# Altium PCB ROW.PcbDoc (part 2 of 3)
Units mm, origin at the board's own origin, x right, y up, seen from the top; angles counter-clockwise.
Board outline 176.65 x 110.9 mm, 2 copper layers (Top Layer, Bottom Layer); 156 components, 298 nets, 1223 pads, 409 vias.
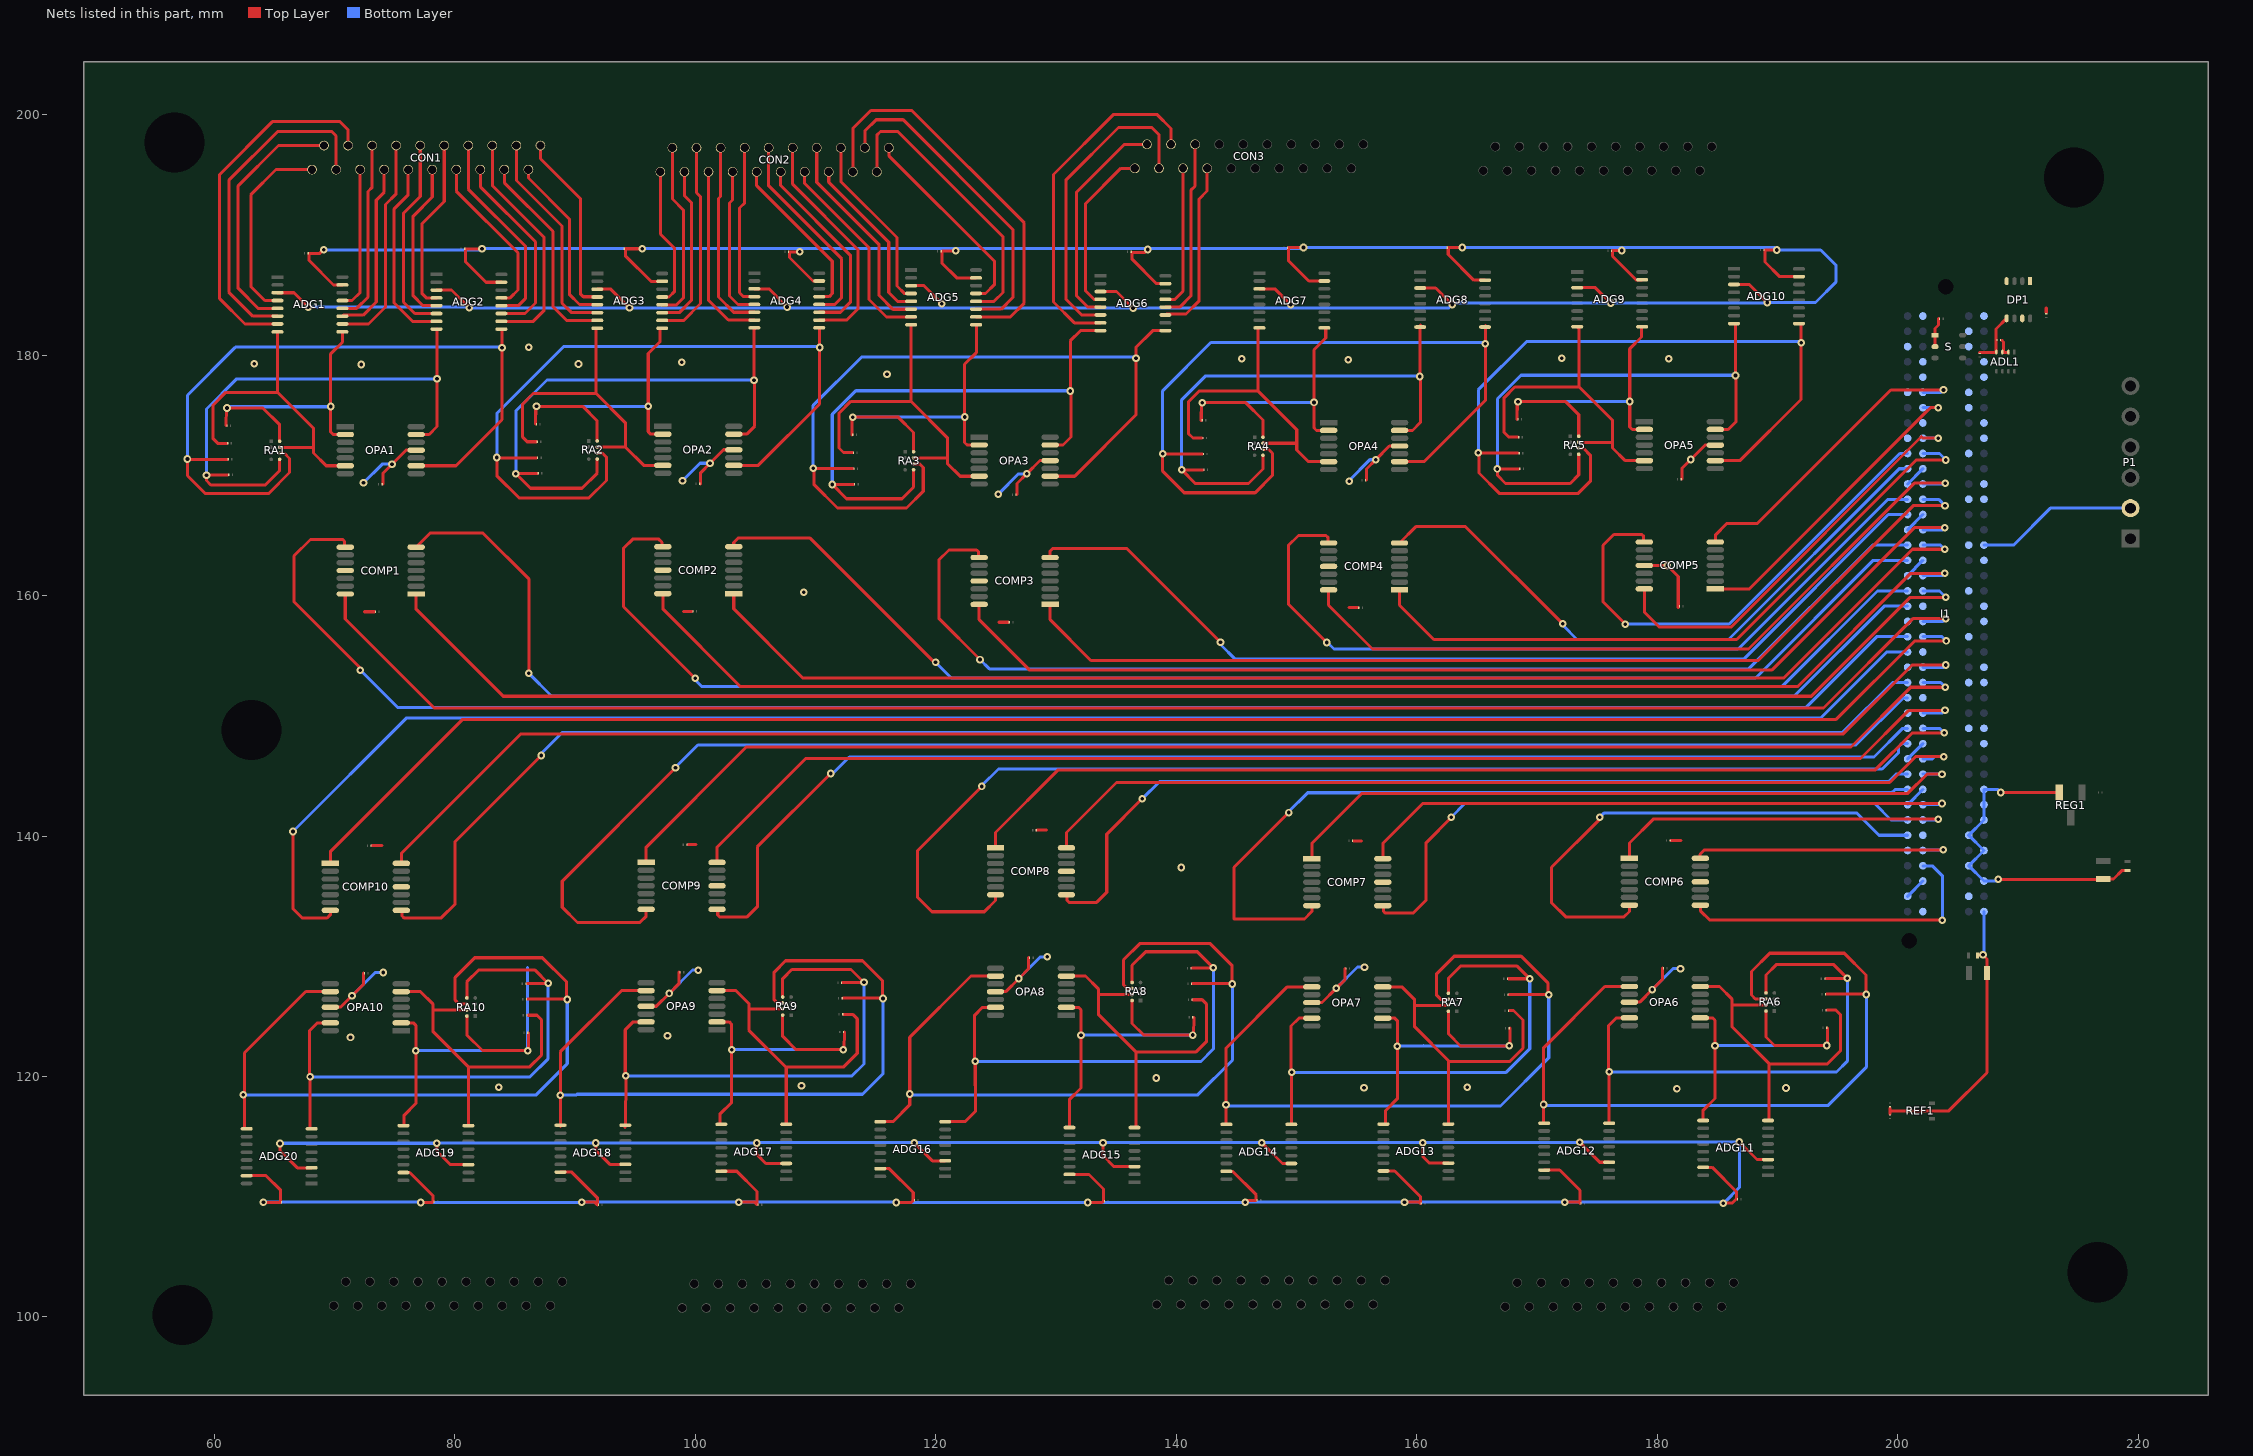
[diagram p2: the nets of this part, all layers, seen from the top]

## Via types
v1: diameter 0.635, hole 0.305, Top Layer to Bottom Layer, 409 vias

## Nets (pads, with @x,y where several pads share a name; then routed paths per layer and width w, separated by ;. In a path a pad name is that pad's centre, name@x,y a point inside that pad or via, vN(x,y) a via of type N, cw(c..) or ccw(c..) an arc to the next point about the centre after c; other vN are vias at no path point) (continued)
GND: ADG1.3 ADG1.15 ADG2.3 ADG2.15 ADG3.3 ADG3.15 ADG4.3 ADG4.15 ADG5.3 ADG5.15 ADG6.3 ADG6.15 ADG7.3 ADG7.15 ADG8.3 ADG8.15 ADG9.3 ADG9.15 ADG10.3 ADG10.15 ADG11.3 ADG11.15 ADG12.3 ADG12.15 ADG13.3 ADG13.15 ADG14.3 ADG14.15 ADG15.3 ADG15.15 ADG16.3 ADG16.15 ADG17.3 ADG17.15 ADG18.3 ADG18.15 ADG19.3 ADG19.15 ADG20.3 ADG20.15 ADL1.4 C1.2 C2.2 C3.2 C4.2 C5.2 C6.2 C7.2 C8.2 C9.2 C10.2 C31.1 C32.1 C33.1 C34.1 C35.1 C36.1 C37.1 C38.1 C39.1 C40.1 C41.1 C42.1 C43.1 C44.1 C45.1 C46.1 C47.1 C48.1 C49.1 C50.1 C51.2 C52.2 C53.2 C54.2 C55.2 C56.2 C57.2 C58.2 C59.2 C60.2 C81.1 C82.1 C83.1 C84.1 C85.1 C86.1 C87.1 C88.1 C89.1 C90.1 COMP1.11 COMP2.11 COMP3.11 COMP4.11 COMP5.11 COMP6.11 COMP7.11 COMP8.11 COMP9.11 COMP10.11 DP1.1 DP1.4 DP1.5 DP1.7 I1.1 I1.2 I1.c1 I1.c4 I1.c5 I1.c8 I1.c9 I1.c12 I1.c13 I1.c16 I1.c17 I1.c20 I1.c21 I1.c24 I1.c25 I1.c28 I1.c29 I1.c32 I1.c33 I1.c34 I1.c36 I1.c38 I1.c40 I1.d2 I1.d3 I1.d6 I1.d7 I1.d10 I1.d13 I1.d16 I1.d19 I1.d22 I1.d25 I1.d28 I1.d35 I1.d37 I1.d39 I1.g1 I1.g4 I1.g5 I1.g8 I1.g11 I1.g14 I1.g17 I1.g20 I1.g23 I1.g26 I1.g29 I1.g32 I1.g35 I1.g38 I1.g40 I1.h3 I1.h6 I1.h9 I1.h12 I1.h15 I1.h18 I1.h21 I1.h24 I1.h27 I1.h30 I1.h33 I1.h36 I1.h39 OPA1.11 OPA2.11 OPA3.11 OPA4.11 OPA5.11 OPA6.11 OPA7.11 OPA8.11 OPA9.11 OPA10.11 P1.2 REF1.3 REG1.2 S.1 S.2 | length 851.6
  Top Layer w0.254: ADG20.15@62.68,111.755 64.29,111.755 65.503,110.542 65.503,109.535 64.09,109.535 v1(64.075,109.55) ; ADG1.3@65.244,185.184 66.616,185.184 v1(67.8,184) ; v1(65.45,114.425) 65.45,113.85 66.895,112.405 ADG20.3@68.08,112.405 ; v1(69.1,188.75) 69.05,188.75 68.73,188.43 67.88,188.43 67.88,187.858 69.904,185.834 ADG1.15@70.644,185.834 ; OPA10.11@69.636,125.762 70.487,125.762 v1(71.439,126.714) 72.39,127.665 72.39,128.595 ; 72.49,158.65 73.305,158.65 ; 73.11,139.205 73.945,139.205 ; 74.03,169.26 74.03,170.19 v1(74.765,170.925) 75.933,172.093 OPA1.11@76.784,172.093 ; ADG19.15@75.72,112.015 76.233,112.015 78.193,110.055 78.193,109.595 ; v1(77.15,109.525) 78.123,109.525 ; ADG2.3@78.465,185.406 79.719,185.406 v1(81.2,183.925) ; v1(78.5,114.45) 78.5,113.8 79.635,112.665 ADG19.3@81.12,112.665 ; v1(82.25,188.85) 82.23,188.83 80.89,188.83 80.89,187.745 82.579,186.056 ADG2.15@83.865,186.056 ; ADG18.15@88.78,112.045 89.72,112.045 91.846,109.919 91.846,109.335 91.631,109.55 v1(90.55,109.55) ; v1(91.725,114.475) 91.725,113.85 92.88,112.695 ADG18.3@94.18,112.695 ; ADG3.3@91.84,185.48 92.97,185.48 v1(94.525,183.925) ; v1(95.575,188.85) 95.565,188.84 94.174,188.84 94.174,188.256 96.3,186.13 ADG3.15@97.24,186.13 ; OPA9.11@95.896,125.842 96.747,125.842 v1(97.815,126.91) 98.65,127.745 98.65,128.675 ; 99.01,158.68 99.72,158.68 ; 99.37,139.285 100.055,139.285 ; 100.44,169.29 100.44,170.22 v1(101.22,171) 102.343,172.123 OPA2.11@103.194,172.123 ; ADG17.15@102.155,112.119 103.441,112.119 105.13,110.43 105.13,109.345 104.925,109.55 v1(103.6,109.55) ; ADG4.3@104.9,185.51 106.115,185.51 v1(107.625,184) ; v1(105.1,114.475) 105.1,113.525 105.856,112.769 ADG17.3@107.555,112.769 ; v1(108.675,188.6) 108.655,188.58 107.827,188.58 107.827,188.12 109.787,186.16 ADG4.15@110.3,186.16 ; ADG16.15@115.376,112.341 116.134,112.341 118.12,110.355 118.12,109.695 117.95,109.525 v1(116.7,109.525) ; ADG5.3@117.94,185.77 119.005,185.77 v1(120.5,184.275) ; v1(118.2,114.5) 119.709,112.991 ADG16.3@120.776,112.991 ; v1(121.65,188.675) 121.615,188.64 120.517,188.64 120.517,187.633 121.73,186.42 ADG5.15@123.34,186.42 ; OPA8.11@124.956,127.052 125.807,127.052 v1(126.905,128.15) 127.71,128.955 127.71,129.885 ; 125.26,157.78 126.03,157.78 ; 126.75,168.39 126.75,169.32 v1(127.55,170.12) 128.653,171.223 OPA3.11@129.504,171.223 ; 128.43,140.495 129.215,140.495 ; ADG15.15@131.12,111.855 132.73,111.855 133.943,110.642 133.943,109.635 133.833,109.525 v1(132.625,109.525) ; ADG6.3@133.684,185.284 135.016,185.284 v1(136.4,183.9) ; v1(133.9,114.5) 133.9,113.425 134.82,112.505 ADG15.3@136.52,112.505 ; v1(137.625,188.775) 137.38,188.53 136.32,188.53 136.32,187.958 138.344,185.934 ADG6.15@139.084,185.934 ; ADG14.15@144.16,112.115 144.673,112.115 146.633,110.155 146.633,109.695 145.87,109.695 v1(145.725,109.55) ; ADG7.3@146.905,185.506 148.194,185.506 v1(149.525,184.175) ; v1(147.1,114.5) 148.835,112.765 ADG14.3@149.56,112.765 ; v1(150.575,188.95) 150.555,188.93 149.33,188.93 149.33,187.845 151.019,186.156 ADG7.15@152.305,186.156 ; OPA7.11@151.266,126.152 152.117,126.152 v1(153.3,127.335) 154.02,128.055 154.02,128.985 ; 154.34,158.99 155.09,158.99 ; 154.74,139.595 155.395,139.595 ; 155.81,169.6 155.81,170.53 v1(156.575,171.295) 157.713,172.433 OPA4.11@158.564,172.433 ; ADG13.15@157.22,112.145 158.16,112.145 160.286,110.019 160.286,109.435 160.171,109.55 v1(158.975,109.55) ; ADG8.3@160.28,185.58 161.57,185.58 v1(162.95,184.2) ; v1(160.5,114.5) 160.5,113.35 161.055,112.795 ADG13.3@162.62,112.795 ; v1(163.775,188.95) 163.765,188.94 162.614,188.94 162.614,188.356 164.74,186.23 ADG8.15@165.68,186.23 ; ADG12.15@170.595,112.219 171.881,112.219 173.57,110.53 173.57,109.445 173.465,109.55 v1(172.3,109.55) ; ADG9.3@173.34,185.61 174.84,185.61 v1(176.125,184.325) ; v1(173.55,114.525) 175.206,112.869 ADG12.3@175.995,112.869 ; v1(177.05,188.7) 177.03,188.68 176.267,188.68 176.267,188.22 178.227,186.26 ADG9.15@178.74,186.26 ; OPA6.11@177.676,126.182 178.527,126.182 v1(179.575,127.23) 180.43,128.085 180.43,129.015 ; COMP5.11@178.92,162.5 v1(180.825,162.5) 181.742,161.583 181.742,159.024 ; 181.15,139.625 181.985,139.625 ; 182.07,169.68 182.07,170.61 v1(182.775,171.315) 183.973,172.513 OPA5.11@184.824,172.513 ; ADG11.15@183.816,112.441 184.556,112.441 186.58,110.417 186.58,109.845 186.205,109.47 v1(185.48,109.47) ; ADG10.3@186.38,185.87 187.655,185.87 v1(189.15,184.375) ; v1(186.825,114.55) 188.284,113.091 ADG11.3@189.216,113.091 ; v1(189.94,188.74) 188.957,188.74 188.957,187.733 190.17,186.52 ADG10.15@191.78,186.52 ; 199.35,116.89 199.35,117.39 ; 199.35,117.14 REF1.3@200.925,117.14 204.24,117.14 207.42,120.32 C48.1@207.42,128.61 207.42,129.78 v1(207.08,130.12) 206.675,130.12 C47.1@206.635,130.08 ; S.2@203.095,180.705 S.1@203.095,181.655 203.095,182.215 203.385,182.505 ; 203.395,182.505 203.395,183.045 ; 206.81,180.22 208.17,180.22 208.173,180.223 208.173,182.173 DP1.5@209.05,183.05 ; v1(208.35,136.4) C50.1@216.775,136.4 ; v1(208.575,143.625) 208.58,143.62 REG1.2@213.43,143.62 ; 212.345,183.535 212.345,183.92 ; C50.1@217.07,136.42 217.94,136.42 218.665,137.145 C49.1@219.095,137.145
  Bottom Layer w0.254: v1(64.075,109.55) 77.125,109.55 v1(77.15,109.525) 90.525,109.525 v1(90.55,109.55) v1(103.6,109.55) 116.675,109.55 v1(116.7,109.525) v1(132.625,109.525) 145.7,109.525 v1(145.725,109.55) v1(158.975,109.55) v1(172.3,109.55) 185.61,109.55 186.825,110.765 v1(186.825,114.55) 173.575,114.55 v1(173.55,114.525) 160.525,114.525 v1(160.5,114.5) v1(147.1,114.5) v1(133.9,114.5) v1(118.2,114.5) 105.125,114.5 v1(105.1,114.475) v1(91.725,114.475) 78.525,114.475 v1(78.5,114.45) 65.475,114.45 v1(65.45,114.425) ; v1(67.8,184) 81.125,184 v1(81.2,183.925) v1(94.525,183.925) 162.675,183.925 v1(162.95,184.2) 163.075,184.325 v1(176.125,184.325) v1@189.1,184.325 ; v1(69.1,188.75) 82.15,188.75 v1(82.25,188.85) v1(95.575,188.85) 150.475,188.85 v1(150.575,188.95) v1(163.775,188.95) v1@189.73,188.95 ; v1(71.439,126.714) 73.375,128.65 v1(74.05,128.65) ; v1(72.4,169.375) 73.95,170.925 v1(74.765,170.925) ; v1(97.815,126.91) 99.755,128.85 v1(100.25,128.85) ; v1(98.925,169.55) 100.375,171 v1(101.22,171) ; v1@108.84,160.26 v1(109,160.26) ; v1(125.175,168.425) 126.87,170.12 v1(127.55,170.12) ; v1(126.905,128.15) 128.705,129.95 v1(129.275,129.95) ; v1(153.3,127.335) 155.065,129.1 v1(155.65,129.1) ; v1(154.375,169.5) 154.375,169.575 156.095,171.295 v1(156.575,171.295) ; v1(179.575,127.23) 181.32,128.975 v1(181.925,128.975) ; v1(189.15,184.375) 193.15,184.375 194.875,186.1 194.875,187.45 193.585,188.74 v1(189.94,188.74) ; I1.h39@200.815,134.985 I1.g38@202.085,136.255 ; I1.h33@200.815,142.605 I1.g32@202.085,143.875 ; I1.h30@200.815,146.415 I1.g29@202.085,147.685 ; I1.h18@200.815,161.655 I1.g17@202.085,162.925 ; I1.h15@200.815,165.465 I1.g14@202.085,166.735 ; I1.h12@200.815,169.275 I1.g11@202.085,170.545 ; v1(207.08,130.12) v1@207.09,130.13 ; v1@207.165,130.205 I1.c40@207.165,133.715 ; I1.c16@207.165,164.195 209.62,164.195 212.69,167.265 P1.2@219.35,167.265 ; v1(208.35,136.4) 208.205,136.255 I1.c38@207.165,136.255 I1.d37@205.895,137.525 I1.c36@207.165,138.795 I1.d35@205.895,140.065 I1.c34@207.165,141.335 I1.c33@207.165,142.605 I1.c32@207.165,143.875 208.325,143.875 v1(208.575,143.625)
  other v1: 181.63,118.98 155.61,119.06 190.7,119.04 83.65,119.1 164.18,119.12 108.825,119.225 138.34,119.88 71.32,123.25 97.68,123.38 140.42,137.38 115.94,178.39 72.22,179.22 90.28,179.26 63.3,179.27 98.86,179.4 154.3,179.62 145.45,179.69 180.94,179.7 172.04,179.73 86.15,180.64
GND0: 
M1: ADG1.9 C11.2 OPA1.2 RA1.8 | length 26.4
  Top Layer w0.254: 60.966,174.131 60.986,175.6 v1(61.045,175.6) 64.025,175.6 65.423,174.202 RA1.8@65.423,172.825 ; ADG1.9@70.644,181.934 70.644,181.074 69.668,180.098 v1(69.668,175.72) 69.668,173.602 69.877,173.393 OPA1.2@70.884,173.393
  Bottom Layer w0.254: v1@61.145,175.7 69.648,175.7 v1(69.668,175.72)
M2: ADG1.8 C12.2 OPA1.6 RA1.7 | length 32.1
  Top Layer w0.254: 61.028,172.662 60.273,172.662 59.895,173.04 59.895,175.845 60.95,176.9 65.244,176.9 ADG1.8@65.244,181.934 65.244,176.906 68.233,173.917 68.233,171.857 69.297,170.793 OPA1.6@70.884,170.793 ; RA1.7@65.423,172.325 68.208,172.325
M3: ADG2.9 C13.2 OPA1.9 RA1.6 | length 65.9
  Top Layer w0.254: 61.065,171.323 57.801,171.323 57.774,171.35 v1(57.754,171.35) 57.754,169.971 59.25,168.475 64.5,168.475 66.25,170.225 66.25,171.4 65.825,171.825 RA1.6@65.423,171.825 ; OPA1.9@76.784,170.793 80.083,170.793 83.915,174.625 ADG2.9@83.915,182.106
  Bottom Layer w0.254: v1(57.754,171.35) 57.754,176.654 61.7,180.6 ; 61.77,180.67 66.71,180.67 v1@83.85,180.67
  other v1: 83.92,180.6
M4: ADG2.8 C14.2 OPA1.13 RA1.5 | length 45.7
  Top Layer w0.254: v1(59.335,170.01) 59.335,169.565 59.7,169.2 64.225,169.2 65.423,170.398 RA1.5@65.423,171.325 ; v1@59.335,170.013 61.118,170.013 ; OPA1.13@76.784,173.393 77.856,173.393 78.515,174.052 ADG2.8@78.515,182.106
  Bottom Layer w0.254: v1(59.335,170.01) 59.335,175.51 61.85,178.025 v1(78.515,178.025)
M5: ADG3.9 C15.2 OPA2.2 RA2.8 | length 28.2
  Top Layer w0.254: 86.701,174.261 86.721,175.73 v1(86.78,175.73) 90.62,175.73 91.833,174.517 RA2.8@91.833,172.855 ; ADG3.9@97.054,182.21 97.054,181.104 96.078,180.128 v1(96.078,175.75) 96.078,173.632 96.287,173.423 OPA2.2@97.294,173.423
  Bottom Layer w0.254: v1@86.91,175.73 96.058,175.73 v1(96.078,175.75)
M6: ADG3.8 C16.2 OPA2.6 RA2.7 | length 27.4
  Top Layer w0.254: 86.763,172.792 86.008,172.792 85.63,173.17 85.63,175.93 86.5,176.8 91.75,176.8 ; ADG3.8@91.75,182.14 91.75,176.8 ; RA2.7@91.833,172.355 94.175,172.355 ; OPA2.6@97.294,170.823 95.707,170.823 94.175,172.355 ; 91.75,176.8 94.175,174.375 94.175,172.355
M7: ADG4.9 C17.2 OPA2.9 RA2.6 | length 66.3
  Top Layer w0.254: 86.8,171.453 83.536,171.453 83.509,171.48 v1(83.489,171.48) 83.489,169.961 85.325,168.125 91.15,168.125 92.6,169.575 92.6,171.5 92.245,171.855 RA2.6@91.833,171.855 ; OPA2.9@103.194,170.823 105.233,170.823 110.325,175.915 ADG4.9@110.325,182.136
  Bottom Layer w0.254: v1(83.489,171.48) 83.489,175.139 89.08,180.73 v1@110.23,180.73
  other v1: 110.33,180.63
M8: ADG4.8 C18.2 OPA2.13 RA2.5 | length 46.9
  Top Layer w0.254: 86.853,170.143 85.07,170.143 86.288,168.925 90.575,168.925 91.833,170.183 RA2.5@91.833,171.355 ; OPA2.13@103.194,173.423 104.266,173.423 104.925,174.082 v1@104.925,177.86 ; v1(104.875,177.91) ADG4.8@104.875,182.186
  Bottom Layer w0.254: v1(85.07,170.14) 85.07,175.345 87.655,177.93 v1@104.855,177.93
M9: ADG5.9 C19.2 OPA3.2 RA3.8 | length 29.4
  Top Layer w0.254: 113.011,173.361 113.031,174.83 v1(113.09,174.83) 116.87,174.83 118.143,173.557 RA3.8@118.143,171.955 ; ADG5.9@123.364,182.496 123.364,180.204 122.388,179.228 v1(122.388,174.85) 122.388,172.732 122.597,172.523 OPA3.2@123.604,172.523
  Bottom Layer w0.254: v1@113.22,174.83 122.368,174.83 v1(122.388,174.85)
M10: ADG5.8 C20.2 OPA3.6 RA3.7 | length 29.2
  Top Layer w0.254: 113.073,171.892 112.318,171.892 111.94,172.27 111.94,175.165 112.925,176.15 117.925,176.15 ; ADG5.8@117.925,182.505 117.925,176.15 ; RA3.7@118.143,171.455 120.948,171.455 ; OPA3.6@123.604,169.923 122.017,169.923 120.953,170.987 120.953,173.122 117.925,176.15
M11: ADG6.9 C21.2 OPA3.9 RA3.6 | length 69.5
  Top Layer w0.254: 113.11,170.553 109.846,170.553 109.846,169.254 111.825,167.275 117.55,167.275 118.95,168.675 118.95,170.65 118.645,170.955 RA3.6@118.143,170.955 ; OPA3.9@129.504,169.923 131.543,169.923 136.635,175.015 136.635,180.635 138.034,182.034 ADG6.9@139.084,182.034
  Bottom Layer w0.254: v1(109.799,170.58) 109.799,175.819 113.81,179.83 v1@136.54,179.83
  other v1: 136.64,179.73
M12: ADG6.8 C22.2 OPA3.13 RA3.5 | length 50.1
  Top Layer w0.254: 113.163,169.243 111.38,169.243 112.573,168.05 117.175,168.05 118.143,169.018 RA3.5@118.143,170.455 ; OPA3.13@129.504,172.523 130.576,172.523 131.235,173.182 v1@131.235,176.96 ; v1(131.185,177.01) 131.18,181.18 132.034,182.034 ADG6.8@133.684,182.034
  Bottom Layer w0.254: v1(111.38,169.24) 111.38,175.07 113.34,177.03 v1@131.165,177.03
M13: ADG7.9 C23.2 OPA4.2 RA4.8 | length 27.8
  Top Layer w0.254: 142.071,174.571 142.091,176.04 v1(142.15,176.04) 145.76,176.04 147.203,174.597 RA4.8@147.203,173.165 ; ADG7.9@152.424,182.274 152.424,181.414 151.448,180.438 v1(151.448,176.06) 151.448,173.942 151.657,173.733 OPA4.2@152.664,173.733
  Bottom Layer w0.254: v1@142.28,176.04 151.428,176.04 v1(151.448,176.06)
M14: ADG7.8 C24.2 OPA4.6 RA4.7 | length 27.5
  Top Layer w0.254: 142.133,173.102 141.378,173.102 141,173.48 141,176.1 141.925,177.025 146.775,177.025 ; ADG7.8@146.905,182.256 146.775,182.126 146.775,177.025 ; RA4.7@147.203,172.665 150.003,172.665 ; OPA4.6@152.664,171.133 150.992,171.133 150.013,172.112 150.013,173.787 146.775,177.025
M15: ADG8.9 C25.2 OPA4.9 RA4.6 | length 67.1
  Top Layer w0.254: 142.17,171.763 138.906,171.763 138.879,171.79 v1(138.859,171.79) 138.859,170.341 140.65,168.55 146.55,168.55 148,170 148,171.825 147.66,172.165 RA4.6@147.203,172.165 ; OPA4.9@158.564,171.133 160.603,171.133 165.695,176.225 ADG8.9@165.695,182.446
  Bottom Layer w0.254: v1(138.859,171.79) 138.859,177.029 142.87,181.04 v1@165.6,181.04
  other v1: 165.7,180.94
M16: ADG8.8 C26.2 OPA4.13 RA4.5 | length 47
  Top Layer w0.254: 142.223,170.453 140.44,170.453 141.568,169.325 146,169.325 147.203,170.528 RA4.5@147.203,171.665 ; OPA4.13@158.564,173.733 159.636,173.733 160.295,174.392 v1@160.295,178.17 ; v1(160.245,178.22) ADG8.8@160.28,182.33
  Bottom Layer w0.254: v1(140.44,170.45) 140.44,176.28 142.4,178.24 v1@160.225,178.24
M17: ADG9.9 C27.2 OPA5.2 RA5.8 | length 28
  Top Layer w0.254: 168.331,174.651 168.351,176.12 v1(168.41,176.12) 172.38,176.12 173.463,175.037 RA5.8@173.463,173.245 ; ADG9.9@178.684,182.354 178.684,181.494 177.708,180.518 v1(177.708,176.14) 177.708,174.022 177.917,173.813 OPA5.2@178.924,173.813
  Bottom Layer w0.254: v1@168.54,176.12 177.688,176.12 v1(177.708,176.14)
M18: ADG9.8 C28.2 OPA5.6 RA5.7 | length 28
  Top Layer w0.254: 168.393,173.182 167.638,173.182 167.26,173.56 167.26,176.46 168.15,177.35 173.5,177.35 ; ADG9.8@173.34,182.36 173.5,182.2 173.5,177.35 ; RA5.7@173.463,172.745 176.243,172.745 ; OPA5.6@178.924,171.213 177.337,171.213 176.273,172.277 176.273,174.577 173.5,177.35
M19: ADG10.9 C29.2 OPA5.9 RA5.6 | length 67.8
  Top Layer w0.254: 168.43,171.843 165.166,171.843 165.166,170.184 166.85,168.5 173.425,168.5 174.425,169.5 174.425,171.675 173.855,172.245 RA5.6@173.463,172.245 ; OPA5.9@184.824,171.213 186.863,171.213 191.955,176.305 ADG10.9@191.955,182.526
  Bottom Layer w0.254: v1(165.119,171.87) 165.119,177.109 169.13,181.12 v1@191.86,181.12
  other v1: 191.96,181.02
M20: ADG10.8 C30.2 OPA5.13 RA5.5 | length 47.8
  Top Layer w0.254: 168.483,170.533 166.7,170.533 v1(166.7,170.53) 166.7,170 167.375,169.325 172.75,169.325 173.463,170.038 RA5.5@173.463,171.745 ; OPA5.13@184.824,173.813 185.896,173.813 186.555,174.472 v1@186.555,178.25 ; v1(186.505,178.3) ADG10.8@186.505,182.576
  Bottom Layer w0.254: v1(166.7,170.53) 166.7,176.36 168.66,178.32 v1@186.485,178.32
M21: ADG11.9 C61.2 OPA6.2 RA6.8 | length 28.3
  Top Layer w0.254: OPA6.2@183.576,124.882 184.583,124.882 184.792,124.673 v1(184.792,122.555) 184.792,118.177 183.816,117.201 ADG11.9@183.816,116.341 ; RA6.8@189.037,125.45 189.037,123.288 189.75,122.575 v1(194.09,122.575) 194.149,122.575 194.169,124.044
  Bottom Layer w0.254: v1(184.792,122.555) 184.812,122.575 186.986,122.575 ; 186.968,122.593 186.986,122.575 ; v1@193.96,122.575 186.986,122.575
M22: ADG11.8 C62.2 OPA6.6 RA6.7 | length 27.8
  Top Layer w0.254: OPA6.6@183.576,127.482 185.163,127.482 186.227,126.418 186.227,124.123 189.3,121.05 ; 186.252,125.95 RA6.7@189.037,125.95 ; ADG11.8@189.3,116.425 189.3,121.05 ; 194.107,125.513 194.862,125.513 195.24,125.135 195.24,122.14 194.15,121.05 189.3,121.05
M23: ADG12.9 C63.2 OPA6.9 RA6.6 | length 68.7
  Top Layer w0.254: ADG12.9@170.545,116.169 170.545,122.39 175.637,127.482 OPA6.9@177.676,127.482 ; RA6.6@189.037,126.45 188.15,126.45 187.825,126.775 187.825,128.725 189.35,130.25 195.55,130.25 197.361,128.439 197.361,126.825 197.334,126.852 194.07,126.852
  Bottom Layer w0.254: v1@170.64,117.575 194.175,117.575 197.381,120.781 v1(197.381,126.825)
  other v1: 170.54,117.675
M24: ADG12.8 C64.2 OPA6.13 RA6.5 | length 48
  Top Layer w0.254: v1@175.945,120.445 175.945,124.223 176.604,124.882 OPA6.13@177.676,124.882 ; ADG12.8@175.995,116.119 v1(175.995,120.395) ; RA6.5@189.037,126.95 189.037,128.437 189.925,129.325 194.637,129.325 195.8,128.162 194.017,128.162
  Bottom Layer w0.254: v1@176.015,120.375 194.9,120.375 195.8,121.275 v1(195.8,128.165)
M25: ADG13.9 C65.2 OPA7.2 RA7.8 | length 28.4
  Top Layer w0.254: OPA7.2@157.166,124.852 158.173,124.852 158.382,124.643 v1(158.382,122.525) 158.382,118.147 157.406,117.171 ADG13.9@157.406,116.065 ; RA7.8@162.627,125.42 162.627,123.548 163.63,122.545 v1(167.68,122.545) 167.739,122.545 167.759,124.014
  Bottom Layer w0.254: v1(158.382,122.525) 158.402,122.545 160.576,122.545 ; 160.558,122.563 160.576,122.545 ; v1@167.55,122.545 160.576,122.545
M26: ADG13.8 C66.2 OPA7.6 RA7.7 | length 27.8
  Top Layer w0.254: OPA7.6@157.166,127.452 158.753,127.452 159.817,126.388 159.817,124.133 162.675,121.275 ; 159.847,125.92 RA7.7@162.627,125.92 ; ADG13.8@162.65,116.075 162.65,121.25 167.725,121.25 168.83,122.355 168.83,124.695 168.042,125.483 167.697,125.483
M27: ADG14.9 C67.2 OPA7.9 RA7.6 | length 67
  Top Layer w0.254: ADG14.9@144.135,116.139 144.135,122.36 149.227,127.452 OPA7.9@151.266,127.452 ; RA7.6@162.627,126.42 161.98,126.42 161.65,126.75 161.65,128.55 163.1,130 168.675,130 170.924,127.751 170.924,126.822 167.66,126.822
  Bottom Layer w0.254: v1@144.23,117.545 166.96,117.545 170.971,121.556 v1(170.971,126.795)
  other v1: 144.13,117.645
M28: ADG14.8 C68.2 OPA7.13 RA7.5 | length 47.1
  Top Layer w0.254: v1@149.535,120.415 149.535,124.193 150.194,124.852 OPA7.13@151.266,124.852 ; ADG14.8@149.585,116.089 v1(149.585,120.365) ; RA7.5@162.627,126.92 162.627,128.177 163.625,129.175 168.347,129.175 169.39,128.132 167.607,128.132
  Bottom Layer w0.254: v1@149.605,120.345 167.43,120.345 169.39,122.305 v1(169.39,128.135)
M29: ADG15.9 C69.2 OPA8.2 RA8.8 | length 29.6
  Top Layer w0.254: OPA8.2@130.856,125.752 131.863,125.752 132.072,125.543 v1(132.072,123.425) 132.072,119.047 131.096,118.071 ADG15.9@131.096,115.779 ; RA8.8@136.317,126.32 136.317,124.408 137.28,123.445 v1(141.37,123.445) 141.429,123.445 141.449,124.914
  Bottom Layer w0.254: v1(132.072,123.425) 132.092,123.445 134.266,123.445 ; 134.248,123.463 134.266,123.445 ; v1@141.24,123.445 134.266,123.445
M30: ADG15.8 C70.2 OPA8.6 RA8.7 | length 29.4
  Top Layer w0.254: OPA8.6@130.856,128.352 132.443,128.352 133.507,127.288 133.507,125.168 136.625,122.05 ; 133.527,126.82 RA8.7@136.317,126.82 ; ADG15.8@136.52,115.755 136.625,115.86 136.625,122.05 ; 141.387,126.383 142.142,126.383 142.52,126.005 142.52,122.92 141.65,122.05 136.625,122.05
M31: ADG16.9 C71.2 OPA8.9 RA8.6 | length 70.2
  Top Layer w0.254: ADG16.9@115.376,116.241 116.426,116.241 117.825,117.64 117.825,123.26 122.917,128.352 OPA8.9@124.956,128.352 ; RA8.6@136.317,127.32 135.905,127.32 135.6,127.625 135.6,129.7 136.95,131.05 142.825,131.05 144.614,129.261 144.614,127.722 141.35,127.722
  Bottom Layer w0.254: v1@117.92,118.445 141.745,118.445 144.661,121.361 v1(144.661,127.695)
  other v1: 117.82,118.545
M32: ADG16.8 C72.2 OPA8.13 RA8.5 | length 50.8
  Top Layer w0.254: ADG16.8@120.776,116.241 122.426,116.241 123.28,117.095 v1(123.275,121.265) ; v1@123.225,121.315 123.225,125.093 123.884,125.752 OPA8.13@124.956,125.752 ; RA8.5@136.317,127.82 136.317,129.242 137.45,130.375 141.737,130.375 143.08,129.032 141.297,129.032
  Bottom Layer w0.254: v1@123.295,121.245 142.045,121.245 143.08,122.28 v1(143.08,129.035)
M33: ADG17.9 C73.2 OPA9.2 RA9.8 | length 28
  Top Layer w0.254: OPA9.2@101.796,124.542 102.803,124.542 103.012,124.333 v1(103.012,122.215) 103.012,117.837 102.036,116.861 ADG17.9@102.036,116.001 ; RA9.8@107.257,125.11 107.257,123.343 108.365,122.235 v1(112.31,122.235) 112.369,122.235 112.389,123.704
  Bottom Layer w0.254: v1(103.012,122.215) 103.032,122.235 105.206,122.235 ; 105.188,122.253 105.206,122.235 ; v1@112.18,122.235 105.206,122.235
M34: ADG17.8 C74.2 OPA9.6 RA9.7 | length 27.7
  Top Layer w0.254: OPA9.6@101.796,127.142 103.383,127.142 104.447,126.078 104.447,123.853 107.555,120.745 ADG17.8@107.555,116.019 ; 104.487,125.61 RA9.7@107.257,125.61 ; 107.555,120.775 112.3,120.775 113.46,121.935 113.46,124.795 113.082,125.173 112.327,125.173
M35: ADG18.9 C75.2 OPA9.9 RA9.6 | length 67.2
  Top Layer w0.254: ADG18.9@88.765,115.829 88.765,122.05 93.857,127.142 OPA9.9@95.896,127.142 ; RA9.6@107.257,126.11 106.815,126.11 106.55,126.375 106.55,128.675 107.5,129.625 113.9,129.625 115.554,127.971 115.554,126.512 112.29,126.512
  Bottom Layer w0.254: v1(88.75,118.45) 90.075,118.45 90.15,118.525 113.9,118.525 115.601,120.226 v1(115.601,126.485)
M36: ADG18.8 C76.2 OPA9.13 RA9.5 | length 47.7
  Top Layer w0.254: v1@94.165,120.105 94.165,123.883 94.824,124.542 OPA9.13@95.896,124.542 ; ADG18.8@94.18,115.945 v1(94.215,120.055) ; RA9.5@107.257,126.61 107.257,128.132 108.025,128.9 112.942,128.9 114.02,127.822 112.237,127.822
  Bottom Layer w0.254: v1@94.235,120.035 113.01,120.035 114.02,121.045 v1(114.02,127.825)
M37: ADG19.9 C77.2 OPA10.2 RA10.8 | length 34.7
  Top Layer w0.254: OPA10.2@75.536,124.462 76.543,124.462 76.752,124.253 v1(76.752,122.135) 76.752,117.757 75.776,116.781 ADG19.9@75.776,115.921 ; RA10.8@80.997,125.03 80.997,123.453 82.295,122.155 v1(86.05,122.155) 86.109,122.155 86.129,123.624
  Bottom Layer w0.254: v1(76.752,122.135) 76.772,122.155 78.946,122.155 ; 78.928,122.173 78.946,122.155 ; v1@85.92,122.155 78.946,122.155 ; v1@86.02,122.285 86.02,129.045
M38: ADG19.8 C78.2 OPA10.6 RA10.7 | length 27.8
  Top Layer w0.254: OPA10.6@75.536,127.062 77.123,127.062 78.187,125.998 78.187,123.713 81.1,120.8 86.225,120.8 87.2,121.775 87.2,124.715 86.822,125.093 86.067,125.093 ; 78.192,125.53 RA10.7@80.997,125.53 ; ADG19.8@81.12,115.915 81.12,120.725
M39: ADG20.9 C79.2 OPA10.9 RA10.6 | length 67.3
  Top Layer w0.254: ADG20.9@62.505,115.749 62.505,121.97 67.597,127.062 OPA10.9@69.636,127.062 ; RA10.6@80.997,126.03 80.345,126.03 80.025,126.35 80.025,128.25 81.65,129.875 87.275,129.875 89.294,127.856 89.294,126.432 86.03,126.432
  Bottom Layer w0.254: v1(62.4,118.475) 62.425,118.45 86.725,118.45 89.341,121.066 v1(89.341,126.405)
M40: ADG20.8 C80.2 OPA10.13 RA10.5 | length 47.5
  Top Layer w0.254: v1@67.905,120.025 67.905,123.803 68.564,124.462 OPA10.13@69.636,124.462 ; ADG20.8@67.955,115.699 v1(67.955,119.975) ; RA10.5@80.997,126.53 80.997,127.872 82,128.875 86.627,128.875 87.76,127.742 85.977,127.742
  Bottom Layer w0.254: v1@67.975,119.955 86.23,119.955 87.76,121.485 v1(87.76,127.745)
NetADL1_2: ADL1.2 ADL1.3 C41.2 | length 1.4
  Top Layer w0.254: 208.65,181.225 208.75,181.125 ; ADL1.3@208.75,180.23 ADL1.2@209.175,180.23 ; ADL1.3@208.775,180.23 208.775,181.1
OUT1: COMP1.14 I1.g21 | length 143.4
  Top Layer w0.254: COMP1.14@70.88,160.13 70.88,158.045 78.275,150.65 193.825,150.65 201.25,158.075 v1(204,158.075)
  Bottom Layer w0.254: I1.g21@202.085,157.845 203.77,157.845 v1(204,158.075)
OUT2: COMP1.8 I1.h22 | length 149.5
  Top Layer w0.254: COMP1.8@70.88,164.03 70.82,164.09 70.82,164.51 70.67,164.66 67.985,164.66 66.625,163.3 66.625,159.475 72.13,153.97 v1(72.13,153.8)
  Bottom Layer w0.254: v1(72.13,153.8) 75.23,150.7 192.375,150.7 198.25,156.575 I1.h22@200.815,156.575
OUT3: COMP1.7 I1.h20 | length 137.8
  Top Layer w0.254: COMP1.7@76.78,164.03 77.95,165.2 82.325,165.2 86.175,161.35 86.175,153.55 v1(86.15,153.525)
  Bottom Layer w0.254: v1(86.15,153.525) 88.025,151.65 191.4,151.65 198.865,159.115 I1.h20@200.815,159.115
OUT4: COMP1.1 I1.g19 | length 137
  Top Layer w0.254: COMP1.1@76.78,160.13 76.78,158.86 84.015,151.625 192.8,151.625 201.025,159.85 v1(204,159.85)
  Bottom Layer w0.254: I1.g19@202.085,160.385 203.465,160.385 v1(204,159.85)
OUT5: COMP2.14 I1.g18 | length 116.4
  Top Layer w0.254: COMP2.14@97.29,160.16 97.29,158.89 103.755,152.425 191.65,152.425 201.075,161.85 v1(203.9,161.85)
  Bottom Layer w0.254: I1.g18@202.085,161.655 203.705,161.655 v1(203.9,161.85)
OUT6: COMP2.8 I1.h19 | length 121.8
  Top Layer w0.254: COMP2.8@97.29,164.06 97.23,164.12 97.23,164.42 96.96,164.69 94.78,164.69 94.025,163.935 94.025,159.075 v1(99.975,153.125)
  Bottom Layer w0.254: v1(99.975,153.125) 99.975,153.005 100.555,152.425 190.35,152.425 198.31,160.385 I1.h19@200.815,160.385
OUT7: COMP2.7 I1.h17 | length 107
  Top Layer w0.254: COMP2.7@103.19,164.06 103.19,164.415 103.55,164.775 109.545,164.775 119.87,154.45 v1(119.975,154.45)
  Bottom Layer w0.254: v1(119.975,154.45) 121.275,153.15 188.175,153.15 197.95,162.925 I1.h17@200.815,162.925
OUT8: COMP2.1 I1.g16 | length 110.8
  Top Layer w0.254: COMP2.1@103.19,160.16 103.19,158.89 108.955,153.125 190.5,153.125 201.225,163.85 v1(203.9,163.85)
  Bottom Layer w0.254: I1.g16@202.085,164.195 203.555,164.195 v1(203.9,163.85)
OUT9: COMP3.14 I1.g15 | length 90.1
  Top Layer w0.254: COMP3.14@123.6,159.26 123.6,157.99 127.765,153.825 189.55,153.825 201.375,165.65 v1(203.9,165.65)
  Bottom Layer w0.254: I1.g15@202.085,165.465 203.715,165.465 v1(203.9,165.65)
OUT10: COMP3.8 I1.h16 | length 95.6
  Top Layer w0.254: COMP3.8@123.6,163.16 123.54,163.22 123.54,163.64 123.39,163.79 121.09,163.79 120.25,162.95 120.25,158.1 v1(123.675,154.675)
  Bottom Layer w0.254: v1(123.675,154.675) 124.45,153.9 187.6,153.9 197.895,164.195 I1.h16@200.815,164.195
OUT11: COMP3.7 I1.h14 | length 80.9
  Top Layer w0.254: COMP3.7@129.5,163.16 129.5,163.7 129.7,163.9 135.9,163.9 v1(143.675,156.125)
  Bottom Layer w0.254: v1(143.675,156.125) 143.675,155.925 144.9,154.7 187.175,154.7 199.21,166.735 I1.h14@200.815,166.735
OUT12: COMP3.1 I1.g13 | length 84.5
  Top Layer w0.254: COMP3.1@129.5,159.26 129.5,157.99 132.89,154.6 188.4,154.6 201.275,167.475 v1(203.925,167.475)
  Bottom Layer w0.254: I1.g13@202.085,168.005 203.395,168.005 v1(203.925,167.475)
OUT13: COMP4.14 I1.g12 | length 61.7
  Top Layer w0.254: COMP4.14@152.66,160.47 152.66,159.2 156.31,155.55 187.575,155.55 201.375,169.35 v1(203.95,169.35)
  Bottom Layer w0.254: I1.g12@202.085,169.275 203.875,169.275 v1(203.95,169.35)
OUT14: COMP4.8 I1.h13 | length 67.3
  Top Layer w0.254: v1(152.5,156.1) 149.31,159.29 149.31,164.16 150.15,165 152.45,165 152.6,164.85 152.6,164.43 COMP4.8@152.66,164.37
  Bottom Layer w0.254: v1(152.5,156.1) 152.56,156.1 153.11,155.55 186.725,155.55 199.18,168.005 I1.h13@200.815,168.005
OUT15: COMP4.7 I1.h11 | length 52.6
  Top Layer w0.254: COMP4.7@158.56,164.37 159.915,165.725 164.05,165.725 v1(172.125,157.65)
  Bottom Layer w0.254: v1(172.125,157.65) 172.125,157.55 173.325,156.35 185.925,156.35 200.12,170.545 I1.h11@200.815,170.545
OUT16: COMP4.1 I1.g10 | length 56.2
  Top Layer w0.254: COMP4.1@158.56,160.47 158.56,159.2 161.41,156.35 186.6,156.35 201.525,171.275 v1(204,171.275)
  Bottom Layer w0.254: I1.g10@202.085,171.815 203.46,171.815 v1(204,171.275)
OUT17: COMP5.14 I1.g9 | length 34.8
  Top Layer w0.254: COMP5.14@178.92,160.55 178.92,158.63 180.175,157.375 186.125,157.375 201.975,173.225 202.115,173.085 v1(203.35,173.085)
  Bottom Layer w0.254: I1.g9@202.085,173.085 v1(203.35,173.085)
OUT18: COMP5.8 I1.h10 | length 41
  Top Layer w0.254: v1(177.325,157.625) 175.475,159.475 175.475,164.175 176.38,165.08 178.71,165.08 178.86,164.93 178.86,164.51 COMP5.8@178.92,164.45
  Bottom Layer w0.254: v1(177.325,157.625) 185.975,157.625 200.165,171.815 I1.h10@200.815,171.815
OUT19: COMP5.7 I1.g6 | length 26.4
  Top Layer w0.254: COMP5.7@184.82,164.45 184.82,165.02 185.8,166 188.325,166 199.425,177.1 v1(203.8,177.1)
  Bottom Layer w0.254: I1.g6@202.085,176.895 203.595,176.895 v1(203.8,177.1)
OUT20: COMP5.1 I1.g7 | length 26
  Top Layer w0.254: COMP5.1@184.82,160.55 187.65,160.55 202.25,175.15 202.725,175.625 v1(203.35,175.625)
  Bottom Layer w0.254: I1.g7@202.085,175.625 v1(203.35,175.625)
OUT21: COMP6.14 I1.g36 | length 22.3
  Top Layer w0.254: COMP6.14@183.55,138.15 183.55,138.475 183.925,138.85 v1(203.775,138.85)
  Bottom Layer w0.254: I1.g36@202.14,138.85 v1(203.775,138.85)
OUT22: COMP6.8 I1.g37 | length 26.6
  Top Layer w0.254: COMP6.8@183.64,134.185 COMP6.8@183.58,134.245 183.58,133.795 184.375,133 v1(203.7,133)
  Bottom Layer w0.254: I1.g37@202.085,137.525 202.875,137.525 203.7,136.7 v1(203.7,133)
OUT23: COMP6.7 I1.h35 | length 42.9
  Top Layer w0.254: v1(175.2,141.55) 175.2,141.4 171.2,137.4 171.2,134.45 172.375,133.275 177.225,133.275 177.68,133.73 COMP6.7@177.68,134.245
  Bottom Layer w0.254: v1(175.2,141.55) 175.55,141.9 196.6,141.9 198.435,140.065 I1.h35@200.815,140.065
OUT24: COMP6.1 I1.g34 | length 29.1
  Top Layer w0.254: COMP6.1@177.68,138.145 177.68,139.415 179.69,141.425 203.325,141.425 v1(203.35,141.4)
  Bottom Layer w0.254: I1.g34@202.085,141.335 203.285,141.335 v1(203.35,141.4)
OUT25: COMP7.14 I1.g33 | length 50.8
  Top Layer w0.254: COMP7.14@157.17,138.115 157.17,139.385 160.485,142.7 v1(203.675,142.7)
  Bottom Layer w0.254: I1.g33@202.085,142.605 203.58,142.605 v1(203.675,142.7)
OUT26: COMP7.8 I1.h34 | length 51.3
  Top Layer w0.254: COMP7.8@157.17,134.215 157.23,134.155 157.23,133.735 157.38,133.585 159.68,133.585 160.775,134.68 160.775,139.45 v1(162.875,141.55)
  Bottom Layer w0.254: v1(162.875,141.55) 162.875,141.59 163.985,142.7 198.075,142.7 199.44,141.335 I1.h34@200.815,141.335
OUT27: COMP7.7 I1.h32 | length 70.4
  Top Layer w0.254: v1(149.35,141.95) 144.8,137.4 144.8,133.1 150.65,133.1 151.27,133.72 COMP7.7@151.27,134.215
  Bottom Layer w0.254: v1(149.35,141.95) 149.275,141.95 150.925,143.6 199.5,143.6 199.775,143.875 I1.h32@200.815,143.875
OUT28: COMP7.1 I1.g31 | length 57.7
  Top Layer w0.254: COMP7.1@151.27,138.115 151.27,139.385 155.435,143.55 200.825,143.55 202.425,145.15 v1(203.675,145.15)
  Bottom Layer w0.254: I1.g31@202.085,145.145 202.09,145.15 v1(203.675,145.15)
OUT29: COMP8.14 I1.g30 | length 78.7
  Top Layer w0.254: COMP8.14@130.86,139.015 130.86,140.285 135.025,144.45 199.325,144.45 201.475,146.6 v1(203.825,146.6)
  Bottom Layer w0.254: I1.g30@202.085,146.415 202.865,146.415 203.05,146.6 v1(203.825,146.6)
OUT30: COMP8.8 I1.h31 | length 77.7
  Top Layer w0.254: COMP8.8@130.86,135.115 130.92,135.055 130.92,134.635 131.07,134.485 133.37,134.485 134.21,135.325 134.21,140.16 v1(137.15,143.1)
  Bottom Layer w0.254: v1(137.15,143.1) 137.175,143.1 138.6,144.525 199.225,144.525 199.845,145.145 I1.h31@200.815,145.145
OUT31: COMP8.7 I1.h29 | length 98.1
  Top Layer w0.254: v1(123.825,144.125) 118.475,138.775 118.475,134.9 119.675,133.7 124.025,133.7 124.96,134.635 COMP8.7@124.96,135.115
  Bottom Layer w0.254: v1@123.75,144.125 v1(123.825,144.125) ; v1@123.825,144.2 125.2,145.575 198.7,145.575 200.05,146.925 200.05,147.4 200.335,147.685 I1.h29@200.815,147.685
OUT32: COMP8.1 I1.g28 | length 85.5
  Top Layer w0.254: COMP8.1@124.96,139.015 124.96,140.285 130.175,145.5 198.125,145.5 201.2,148.575 v1(203.85,148.575)
  Bottom Layer w0.254: I1.g28@202.085,148.955 203.47,148.955 v1(203.85,148.575)
OUT33: COMP9.14 I1.g27 | length 110
  Top Layer w0.254: COMP9.14@101.8,137.805 101.8,139.075 109.175,146.45 196.9,146.45 200.9,150.45 v1(203.925,150.45)
  Bottom Layer w0.254: I1.g27@202.085,150.225 203.7,150.225 v1(203.925,150.45)
OUT34: COMP9.8 I1.h28 | length 108.9
  Top Layer w0.254: COMP9.8@101.8,133.905 101.86,133.845 101.86,133.425 102.01,133.275 104.31,133.275 105.15,134.115 105.15,139.1 v1(111.25,145.2)
  Bottom Layer w0.254: v1(111.25,145.2) 111.425,145.2 112.8,146.575 198.025,146.575 200.405,148.955 I1.h28@200.815,148.955
OUT35: COMP9.7 I1.h26 | length 128.7
  Top Layer w0.254: COMP9.7@95.9,133.905 95.9,133.325 95.375,132.8 90.2,132.8 88.925,134.075 88.925,136.25 v1(98.35,145.675)
  Bottom Layer w0.254: v1@98.3,145.675 v1(98.35,145.675) ; v1@98.35,145.725 100.2,147.575 196.525,147.575 200.445,151.495 I1.h26@200.815,151.495
OUT36: COMP9.1 I1.g25 | length 116.9
  Top Layer w0.254: COMP9.1@95.9,137.805 95.9,139.075 104.225,147.4 196.1,147.4 201.075,152.375 v1(203.95,152.375)
  Bottom Layer w0.254: I1.g25@202.085,152.765 203.56,152.765 v1(203.95,152.375)
OUT37: COMP10.14 I1.g24 | length 137.8
  Top Layer w0.254: COMP10.14@75.54,137.725 75.54,138.54 85.5,148.5 195.475,148.5 201.2,154.225 v1(204,154.225)
  Bottom Layer w0.254: I1.g24@202.085,154.035 203.81,154.035 v1(204,154.225)
OUT38: COMP10.8 I1.h25 | length 137
  Top Layer w0.254: COMP10.8@75.54,133.825 75.6,133.765 75.6,133.345 75.75,133.195 78.87,133.195 80.025,134.35 80.025,139.55 v1(87.175,146.7)
  Bottom Layer w0.254: v1(87.175,146.7) 87.175,146.86 88.94,148.625 195.425,148.625 199.565,152.765 I1.h25@200.815,152.765
OUT39: COMP10.7 I1.h23 | length 150.9
  Top Layer w0.254: v1@66.53,140.47 v1(66.53,140.38) 66.53,133.945 67.3,133.175 69.375,133.175 69.64,133.44 COMP10.7@69.64,133.825
  Bottom Layer w0.254: v1(66.53,140.38) 75.95,149.8 193.575,149.8 199.08,155.305 I1.h23@200.815,155.305
OUT40: COMP10.1 I1.g22 | length 144.7
  Top Layer w0.254: COMP10.1@69.64,137.725 69.64,138.69 80.65,149.7 194.875,149.7 201.4,156.225 v1(204.025,156.225)
  Bottom Layer w0.254: I1.g22@202.085,156.575 203.675,156.575 v1(204.025,156.225)
R1: ADG1.4 CON1.1 | length 16.3
  Top Layer w0.254: ADG1.4@65.244,184.534 64.191,184.534 63.025,185.7 63.025,193.325 65.125,195.425 CON1.1@68.115,195.425
R2: ADG1.5 CON1.2 | length 21
  Top Layer w0.254: ADG1.5@65.244,183.884 65.239,183.879 63.646,183.879 61.975,185.55 61.975,194.075 65.325,197.425 CON1.2@69.115,197.425
R3: ADG1.6 CON1.3 | length 27.7
  Top Layer w0.254: ADG1.6@65.244,183.234 63.196,183.234 61.2,185.23 61.2,194.53 65.26,198.59 69.759,198.59 70.115,198.234 CON1.3@70.115,195.425
R4: ADG1.7 CON1.4 | length 30.1
  Top Layer w0.254: ADG1.7@65.244,182.584 62.536,182.584 60.43,184.69 60.43,195.02 64.82,199.41 70.441,199.41 71.115,198.736 CON1.4@71.115,197.425
R5: ADG1.13 CON1.5 | length 12
  Top Layer w0.254: ADG1.13@70.644,184.534 71.439,184.534 72.115,185.21 CON1.5@72.115,195.425
R6: ADG1.12 CON1.6 | length 15.3
  Top Layer w0.254: ADG1.12@70.644,183.884 71.833,183.884 72.766,184.817 72.766,193.597 73.115,193.946 CON1.6@73.115,197.425
R7: ADG1.11 CON1.7 | length 14.6
  Top Layer w0.254: ADG1.11@70.644,183.234 70.724,183.314 72.366,183.314 73.457,184.405 73.457,192.885 74.115,193.543 CON1.7@74.115,195.425
R8: ADG1.10 CON1.8 | length 18
  Top Layer w0.254: ADG1.10@70.644,182.584 72.808,182.584 74.224,184 74.224,192.522 75.115,193.413 CON1.8@75.115,197.425
R9: ADG2.7 CON1.9 | length 15.7
  Top Layer w0.254: CON1.9@76.115,195.425 76.115,193.322 74.951,192.158 74.951,184.324 76.469,182.806 ADG2.7@78.465,182.806
R10: ADG2.6 CON1.10 | length 16.7
  Top Layer w0.254: CON1.10@77.115,197.425 77.115,193.192 75.718,191.795 75.718,184.404 76.666,183.456 ADG2.6@78.465,183.456
R11: ADG2.5 CON1.11 | length 13.4
  Top Layer w0.254: CON1.11@78.115,195.425 78.115,193.141 76.526,191.552 76.526,184.929 77.349,184.106 ADG2.5@78.465,184.106
R12: ADG2.4 CON1.12 | length 14.5
  Top Layer w0.254: ADG2.4@78.465,184.756 78.436,184.727 77.657,184.727 77.253,185.131 77.253,190.906 79.115,192.768 CON1.12@79.115,197.425
R13: ADG2.13 CON1.13 | length 13.8
  Top Layer w0.254: CON1.13@80.115,195.425 80.115,193.634 85.249,188.5 85.249,185.414 84.591,184.756 ADG2.13@83.865,184.756
R14: ADG2.12 CON1.14 | length 16.9
  Top Layer w0.254: CON1.14@81.115,197.425 81.115,193.802 85.855,189.062 85.855,184.686 85.275,184.106 ADG2.12@83.865,184.106
R15: ADG2.11 CON1.15 | length 16.2
  Top Layer w0.254: CON1.15@82.115,195.425 82.115,194.004 86.703,189.416 86.703,184.323 85.836,183.456 ADG2.11@83.865,183.456
R16: ADG2.10 CON1.16 | length 19.4
  Top Layer w0.254: CON1.16@83.115,197.425 83.115,194.109 87.4,189.824 87.4,183.687 86.519,182.806 ADG2.10@83.865,182.806
R17: ADG3.7 CON1.17 | length 17.2
  Top Layer w0.254: CON1.17@84.115,195.425 84.115,194.342 88.164,190.293 88.164,184.006 89.29,182.88 ADG3.7@91.84,182.88
R18: ADG3.6 CON1.18 | length 18
  Top Layer w0.254: CON1.18@85.115,197.425 85.115,194.516 88.9,190.731 88.9,184.32 89.669,183.551 ADG3.6@91.84,183.551 ; ADG3.6@91.819,183.551 ADG3.6@91.84,183.53
R19: ADG3.5 CON1.19 | length 14.5
  Top Layer w0.254: CON1.19@86.115,195.425 86.115,194.725 89.52,191.32 89.52,185.05 90.369,184.201 91.819,184.201 ADG3.5@91.84,184.18
R20: ADG3.4 CON1.20 | length 15.2
  Top Layer w0.254: CON1.20@87.115,197.425 87.115,196.335 90.43,193.02 90.43,185.1 90.679,184.851 ADG3.4@91.84,184.851 ; ADG3.4@91.819,184.851 ADG3.4@91.84,184.83
R21: ADG3.13 CON2.1 | length 11.7
  Top Layer w0.254: CON2.1@97.092,195.238 97.092,190.058 98.28,188.87 98.28,185.3 97.81,184.83 ADG3.13@97.24,184.83
R22: ADG3.12 CON2.2 | length 14.9
  Top Layer w0.254: ADG3.12@97.24,184.18 98.43,184.18 99,184.75 99,192.07 98.092,192.978 CON2.2@98.092,197.238
R23: ADG3.11 CON2.3 | length 13.8
  Top Layer w0.254: ADG3.11@97.24,183.53 98.66,183.53 99.66,184.53 99.66,192.68 99.092,193.248 CON2.3@99.092,195.238
R24: ADG3.10 CON2.4 | length 16.9
  Top Layer w0.254: ADG3.10@97.24,182.88 99.03,182.88 100.43,184.28 100.43,193.17 100.092,193.508 CON2.4@100.092,197.238
R25: ADG4.7 CON2.5 | length 15.2
  Top Layer w0.254: CON2.5@101.092,195.238 101.092,184.558 102.74,182.91 ADG4.7@104.9,182.91
R26: ADG4.6 CON2.6 | length 16
  Top Layer w0.254: CON2.6@102.092,197.238 102.092,193.192 101.92,193.02 101.92,184.83 103.19,183.56 ADG4.6@104.9,183.56
R27: ADG4.5 CON2.7 | length 12.8
  Top Layer w0.254: CON2.7@103.092,195.238 103.092,192.892 102.84,192.64 102.84,184.91 103.54,184.21 ADG4.5@104.9,184.21
R28: ADG4.4 CON2.8 | length 13.6
  Top Layer w0.254: CON2.8@104.092,197.238 104.092,192.652 103.67,192.23 103.67,185.19 104,184.86 ADG4.4@104.9,184.86
R29: ADG4.13 CON2.9 | length 13.9
  Top Layer w0.254: CON2.9@105.092,195.238 105.092,194.088 111.38,187.8 111.38,185.12 111.12,184.86 ADG4.13@110.3,184.86
R30: ADG4.12 CON2.10 | length 17.1
  Top Layer w0.254: CON2.10@106.092,197.238 106.092,194.068 112.16,188 112.16,184.78 111.59,184.21 ADG4.12@110.3,184.21
R31: ADG4.11 CON2.11 | length 16.2
  Top Layer w0.254: CON2.11@107.092,195.238 107.092,194.108 112.89,188.31 112.89,184.38 112.07,183.56 ADG4.11@110.3,183.56
R32: ADG4.10 CON2.12 | length 19.3
  Top Layer w0.254: CON2.12@108.092,197.238 108.092,194.208 113.53,188.77 113.53,183.85 112.59,182.91 ADG4.10@110.3,182.91
R33: ADG5.7 CON2.13 | length 17.3
  Top Layer w0.254: CON2.13@109.092,195.238 109.092,194.268 114.43,188.93 114.43,184.62 115.89,183.16 ADG5.7@118.27,183.16
R34: ADG5.6 CON2.14 | length 17.9
  Top Layer w0.254: CON2.14@110.092,197.238 110.092,194.368 115.28,189.18 115.28,184.95 116.42,183.81 ADG5.6@118.27,183.81
R35: ADG5.5 CON2.15 | length 14.6
  Top Layer w0.254: CON2.15@111.092,195.238 111.092,194.378 116.08,189.39 116.08,185.2 116.82,184.46 ADG5.5@118.27,184.46
R36: ADG5.4 CON2.16 | length 15.2
  Top Layer w0.254: CON2.16@112.092,197.238 112.092,194.438 116.76,189.77 116.76,185.75 117.4,185.11 ADG5.4@118.27,185.11
R37: ADG5.10 CON2.17 | length 33.5
  Top Layer w0.254: CON2.17@113.092,195.238 113.092,198.842 114.59,200.34 118,200.34 127.34,191 127.34,184.32 126.19,183.17 ADG5.10@123.34,183.17
R38: ADG5.11 CON2.18 | length 27
  Top Layer w0.254: CON2.18@114.092,197.238 114.092,198.632 115.03,199.57 117.28,199.57 126.4,190.45 126.4,184.79 125.43,183.82 ADG5.11@123.34,183.82
R39: ADG5.12 CON2.19 | length 24.5
  Top Layer w0.254: CON2.19@115.092,195.238 115.092,198.292 115.39,198.59 116.84,198.59 125.58,189.85 125.58,185.21 124.84,184.47 ADG5.12@123.34,184.47
R40: ADG5.13 CON2.20 | length 16.9
  Top Layer w0.254: CON2.20@116.092,197.238 116.092,196.578 124.89,187.78 124.89,185.88 124.13,185.12 ADG5.13@123.34,185.12
R41: ADG6.4 CON3.1 | length 14.1
  Top Layer w0.254: ADG6.4@133.684,184.634 133.157,184.634 132.446,185.345 132.446,192.584 135.387,195.525 CON3.1@136.555,195.525
R42: ADG6.5 CON3.2 | length 18.5
  Top Layer w0.254: ADG6.5@133.684,183.984 133.679,183.979 132.659,183.979 131.679,184.959 131.679,193.522 135.682,197.525 CON3.2@137.555,197.525
R43: ADG6.6 CON3.3 | length 25.9
  Top Layer w0.254: ADG6.6@133.684,183.334 132.12,183.334 130.833,184.621 130.833,194.578 135.187,198.932 137.957,198.932 138.555,198.334 CON3.3@138.555,195.525
R44: ADG6.7 CON3.4 | length 28.9
  Top Layer w0.254: ADG6.7@133.684,182.684 131.514,182.684 129.789,184.409 129.789,195.021 134.785,200.017 138.374,200.017 139.555,198.836 CON3.4@139.555,197.525
R45: ADG6.13 CON3.5 | length 12
  Top Layer w0.254: ADG6.13@139.084,184.634 139.879,184.634 140.555,185.31 CON3.5@140.555,195.525
R46: ADG6.12 CON3.6 | length 15.3
  Top Layer w0.254: ADG6.12@139.084,183.984 140.273,183.984 141.206,184.917 141.206,193.697 141.555,194.046 CON3.6@141.555,197.525
R47: ADG6.11 CON3.7 | length 14.6
  Top Layer w0.254: ADG6.11@139.084,183.334 139.164,183.414 140.806,183.414 141.897,184.505 141.897,192.985 142.555,193.643 CON3.7@142.555,195.525